# EAGLE board untitled (EAGLE 9.6.2)
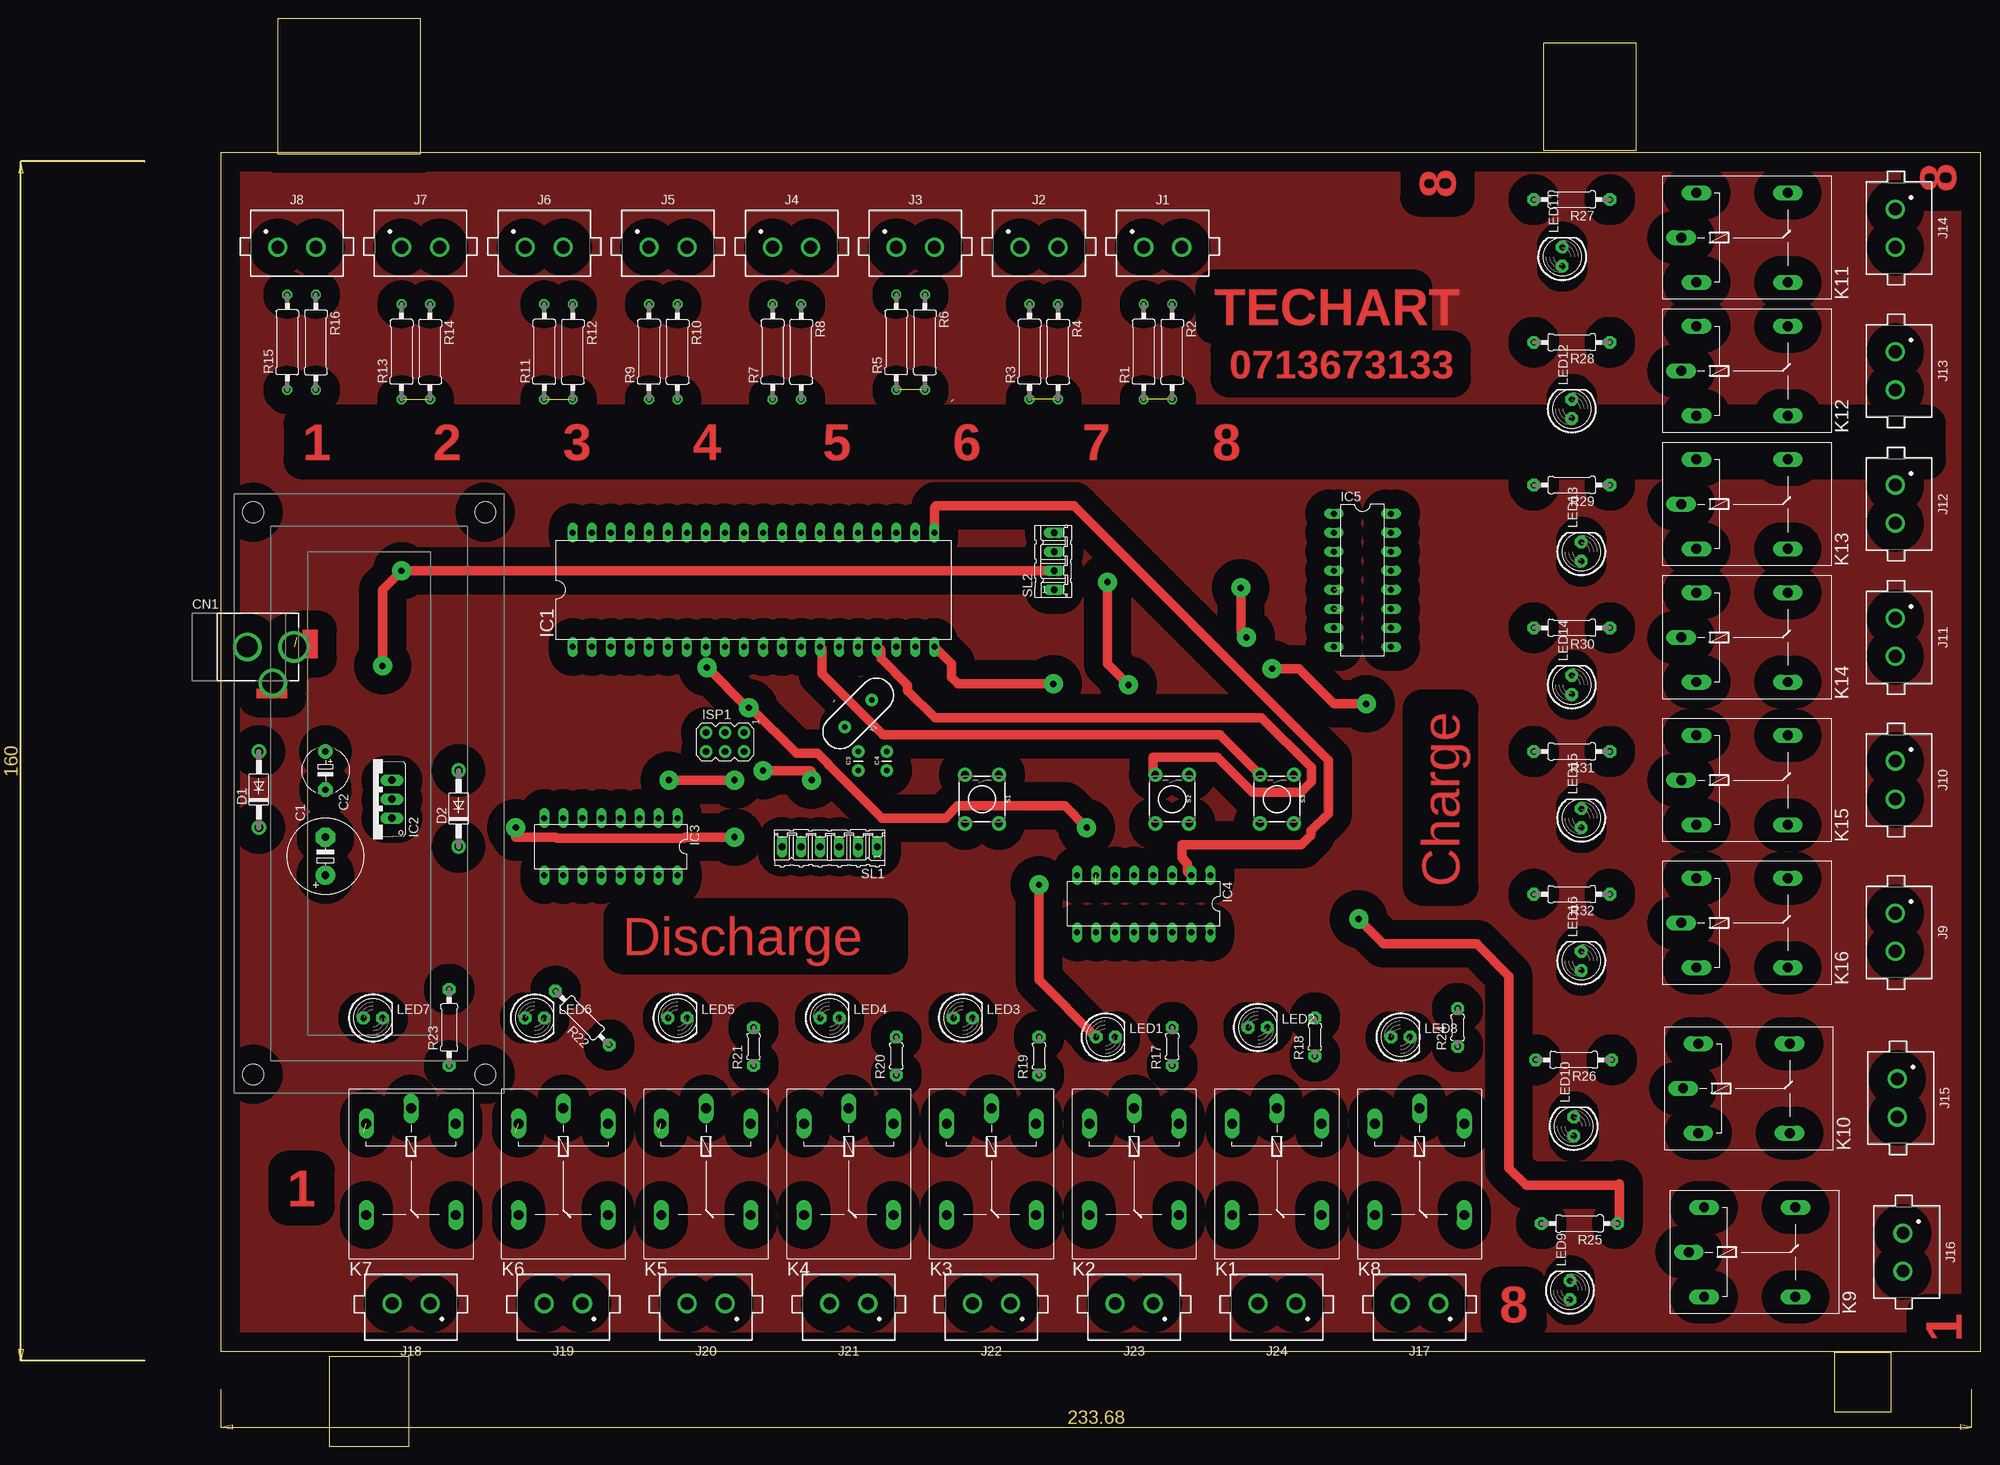
[diagram p0: board, top side]
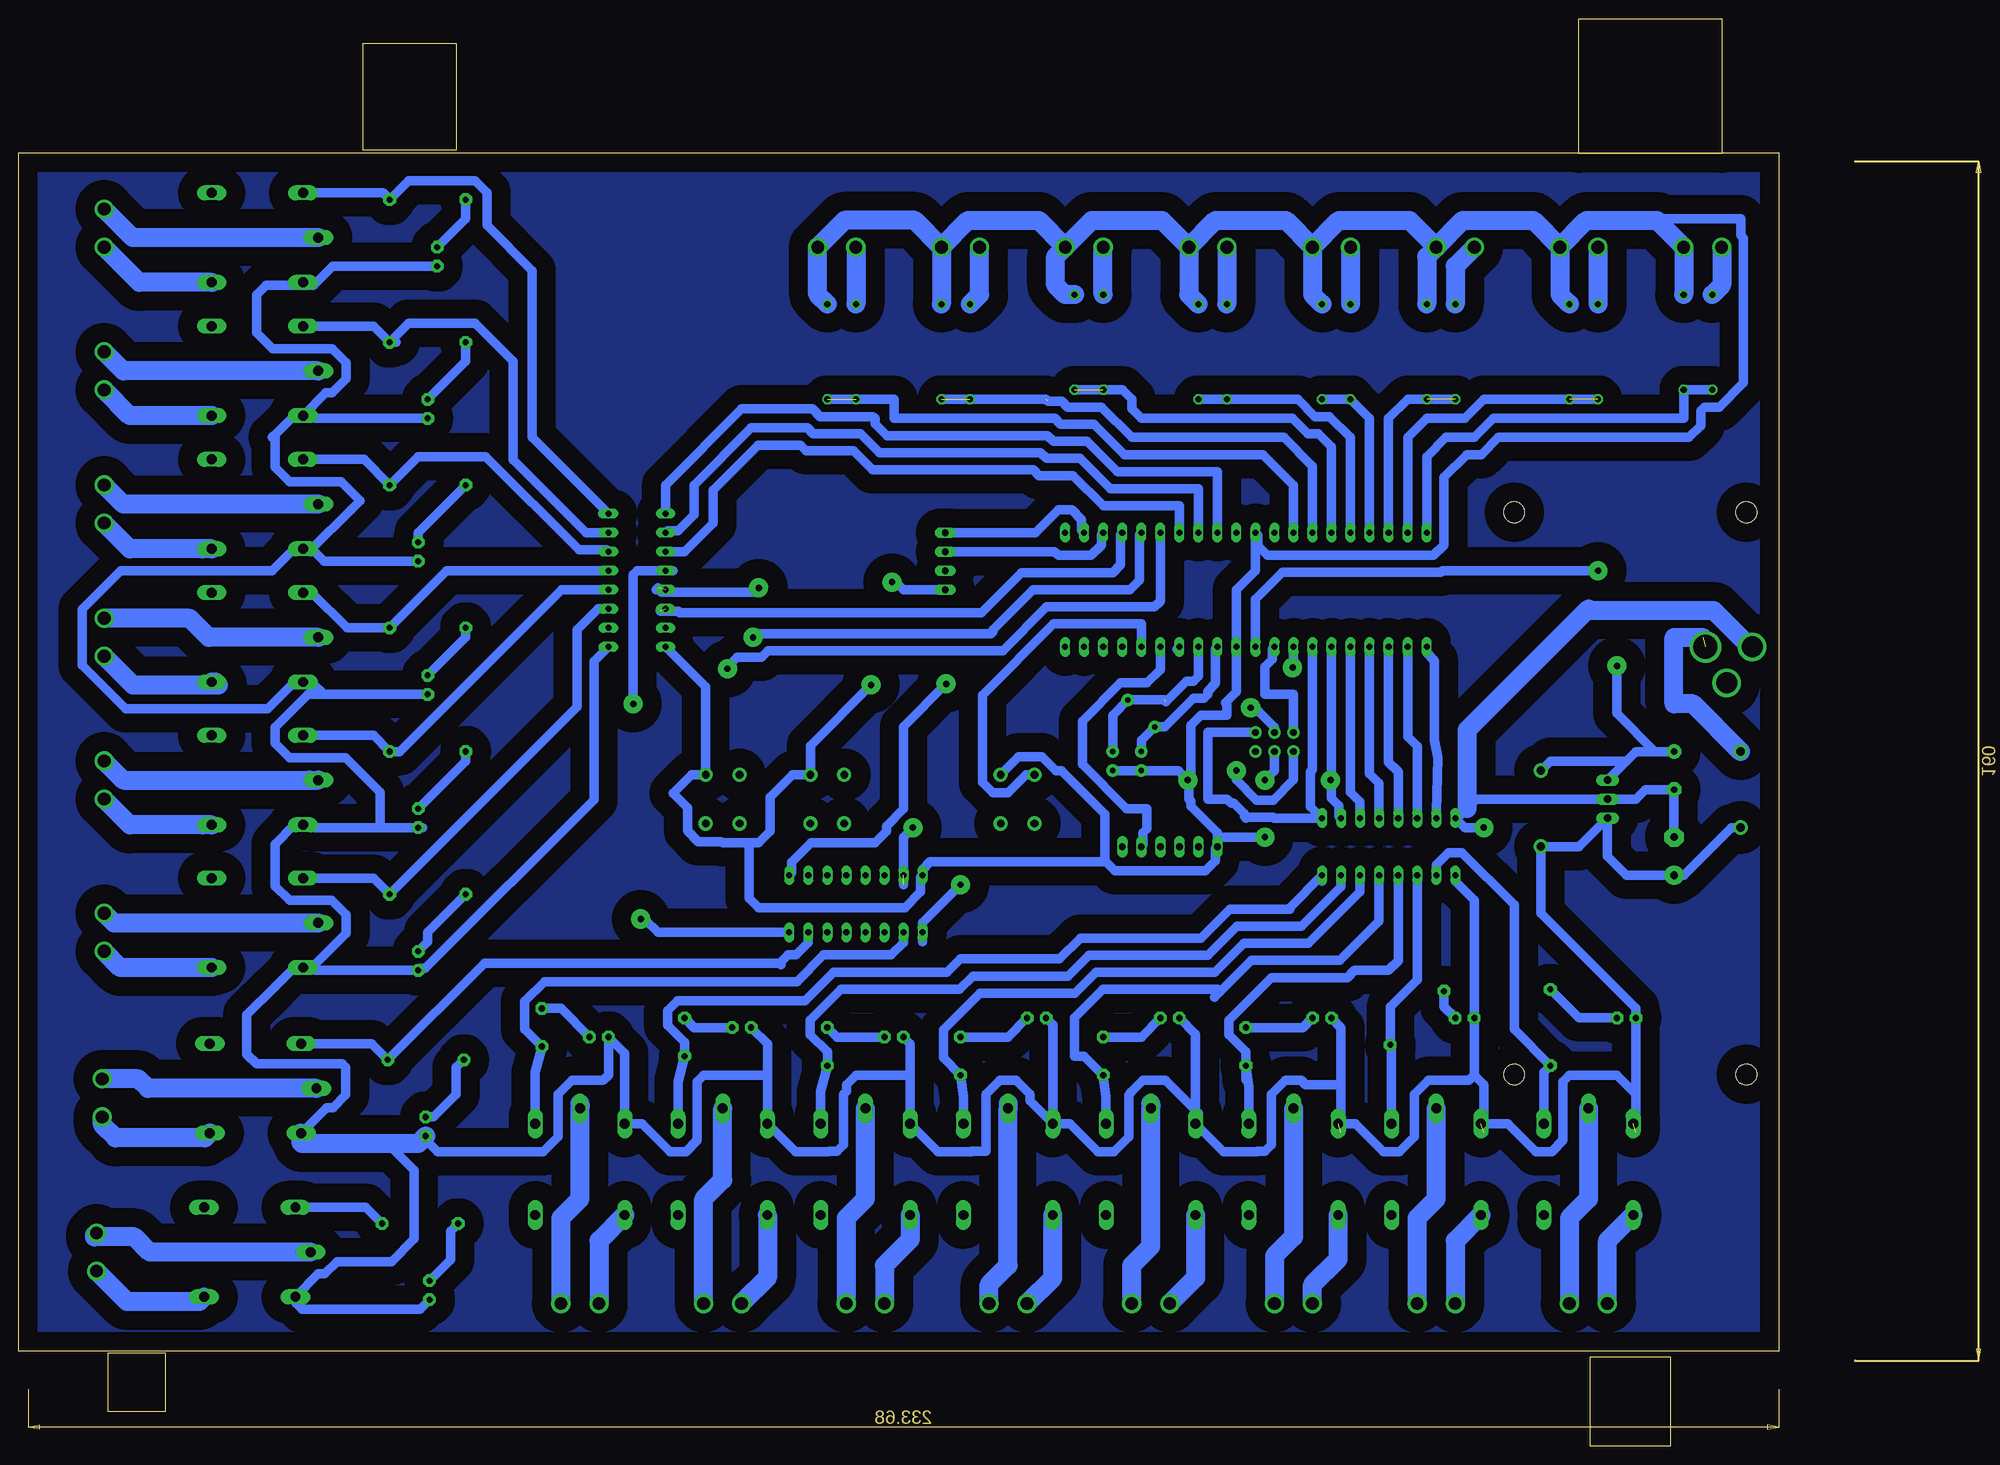
[diagram p1: board, bottom side, seen from below]

Size 234.93 x 190.5 mm. Coordinates in mm from the lower left corner, seen from the top.
Outline: 0,12.7 234.93,12.7 234.93,172.64 0,172.64 0,12.7
Copper layers (1*16): Top 0.035mm / dielectric 1.5mm / Bottom 0.035mm
Design rules "default *": minimum track width 50mil, minimum drill 0.35mm, track to track 40mil, track to pad 30mil, pad to pad 6mil, via to via 6mil, smd to smd 6mil, copper to edge 40mil, drill to drill 6mil, minimum pad ring 10mil, minimum via ring 8mil, stop-mask expansion 4mil, vias tented up to drill 0mil, thermal gap 10mil
Holes 2.8 mm at 4.31,49.62 35.31,49.62 4.31,124.62 35.31,124.62

## Footprints (pad centres in the part's own frame; a part is rotated, then mirrored left to right if it is on the bottom)
E5-10,5 = drill 1.016 pad 2.54: + -2.54,0 | drill 1.016 pad 2.54 octagon: - 2.54,0
E5-6 = drill 0.813 pad 1.905: + -2.54,0 | drill 0.813 pad 1.905 octagon: - 2.54,0
CAP-PTH-2.54 = drill 0.7 pad 1.651: 1 -1.27,0; 2 1.27,0
DCJACK_2MM_PTH = drill 2.8: GND 0,7.35; GNDBREAK 4.8,10.75 | drill 3.2: PWR 0,13.6
DO41-10 = drill 1.118 pad 1.93: A 5.08,0; C -5.08,0
DIL40 = drill 0.813 long: 1 -24.13,-7.62; 2 -21.59,-7.62; 3 -19.05,-7.62; 4 -16.51,-7.62; 5 -13.97,-7.62; 6 -11.43,-7.62; 7 -8.89,-7.62; 8 -6.35,-7.62; 9 -3.81,-7.62; 10 -1.27,-7.62; 11 1.27,-7.62; 12 3.81,-7.62; 13 6.35,-7.62; 14 8.89,-7.62; 15 11.43,-7.62; 16 13.97,-7.62; 17 16.51,-7.62; 18 19.05,-7.62; 19 21.59,-7.62; 20 24.13,-7.62; 21 24.13,7.62; 22 21.59,7.62; 23 19.05,7.62; 24 16.51,7.62; 25 13.97,7.62; 26 11.43,7.62; 27 8.89,7.62; 28 6.35,7.62; 29 3.81,7.62; 30 1.27,7.62; 31 -1.27,7.62; 32 -3.81,7.62; 33 -6.35,7.62; 34 -8.89,7.62; 35 -11.43,7.62; 36 -13.97,7.62; 37 -16.51,7.62; 38 -19.05,7.62; 39 -21.59,7.62; 40 -24.13,7.62
TO220V = drill 1.016 long: 1 -2.54,-2.54; 2 0,-2.54; 3 2.54,-2.54
DIL16 = drill 0.813 long: 1 -8.89,-3.81; 2 -6.35,-3.81; 3 -3.81,-3.81; 4 -1.27,-3.81; 5 1.27,-3.81; 6 3.81,-3.81; 7 6.35,-3.81; 8 8.89,-3.81; 9 8.89,3.81; 10 6.35,3.81; 11 3.81,3.81; 12 1.27,3.81; 13 -1.27,3.81; 14 -3.81,3.81; 15 -6.35,3.81; 16 -8.89,3.81
AVRISP = drill 0.9 pad 1.626: 1 -1.27,2.54; 2 1.27,2.54; 3 -1.27,0; 4 1.27,0; 5 -1.27,-2.54; 6 1.27,-2.54
691305530002 = drill 1.7: 1 -2.54,0; 2 2.54,0
G5LE = drill 1.321 long: 1 -7.493,-5.969; 2 -7.493,5.969; O 4.699,5.969; P -9.525,0; S 4.699,-5.969
LED5MM = drill 0.813 pad 1.676 octagon: A -1.27,0; K 1.27,0
0309/12 = drill 0.813 octagon: 1 -6.35,0; 2 6.35,0
0204/5 = drill 0.813 pad 1.676 octagon: 1 -2.54,0; 2 2.54,0
0207/10 = drill 0.813 pad 1.676 octagon: 1 -5.08,0; 2 5.08,0
TACTILE_SWITCH_PTH_6.0MM_KIT = drill 1.016 pad 1.88: 1 -3.251,2.261; 2 3.251,2.261; 3 -3.251,-2.261; 4 3.251,-2.261
06P = drill 0.914 long: 1 -6.35,0; 2 -3.81,0; 3 -1.27,0; 4 1.27,0; 5 3.81,0; 6 6.35,0
04P = drill 0.914 long: 1 -3.81,0; 2 -1.27,0; 3 1.27,0; 4 3.81,0
HC49US = drill 0.7 pad 1.651: 1 -2.54,0; 2 2.54,0

## Placement (x,y rotation side)
C1  [E5-10,5]  13.97,78.74 90 top
C2  [E5-6]  13.97,90.17 270 top
C3  22pF  [CAP-PTH-2.54]  85.09,91.44 90 top
C4  22pF  [CAP-PTH-2.54]  88.9,91.44 90 top
CN1  [DCJACK_2MM_PTH]  -3.81,106.68 270 top
D1  1N4004  [DO41-10]  5.08,87.63 90 top
D2  1N4004  [DO41-10]  31.75,85.09 90 top
IC1  MEGA16-P  [DIL40]  71.12,114.3 0 top
IC2  7805TV  [TO220V]  20.32,86.36 90 top
IC3  ULN2003AN  [DIL16]  52.07,80.01 180 top
IC4  ULN2003AN  [DIL16]  123.19,72.39 180 top
IC5  ULN2003AN  [DIL16]  152.4,115.57 270 top
ISP1  AVRISP-6  [AVRISP]  67.31,93.98 270 top
J1  [691305530002]  125.73,160.02 0 top
J2  [691305530002]  109.22,160.02 0 top
J3  [691305530002]  92.71,160.02 0 top
J4  [691305530002]  76.2,160.02 0 top
J5  [691305530002]  59.69,160.02 0 top
J6  [691305530002]  43.18,160.02 0 top
J7  [691305530002]  26.67,160.02 0 top
J8  [691305530002]  10.16,160.02 0 top
J9  [691305530002]  223.52,68.58 270 top
J10  [691305530002]  223.52,88.9 270 top
J11  [691305530002]  223.52,107.95 270 top
J12  [691305530002]  223.52,125.73 270 top
J13  [691305530002]  223.52,143.51 270 top
J14  [691305530002]  223.52,162.56 270 top
J15  [691305530002]  223.77,46.48 270 top
J16  [691305530002]  224.54,25.91 270 top
J17  [691305530002]  160.02,19.05 180 top
J18  [691305530002]  25.4,19.05 180 top
J19  [691305530002]  45.72,19.05 180 top
J20  [691305530002]  64.77,19.05 180 top
J21  [691305530002]  83.82,19.05 180 top
J22  [691305530002]  102.87,19.05 180 top
J23  [691305530002]  121.92,19.05 180 top
J24  [691305530002]  140.97,19.05 180 top
K1  G5L  [G5LE]  140.97,35.56 270 top
K2  G5L  [G5LE]  121.92,35.56 270 top
K3  G5L  [G5LE]  102.87,35.56 270 top
K4  G5L  [G5LE]  83.82,35.56 270 top
K5  G5L  [G5LE]  64.77,35.56 270 top
K6  G5L  [G5LE]  45.72,35.56 270 top
K7  G5L  [G5LE]  25.4,35.56 270 top
K8  G5L  [G5LE]  160.02,35.56 270 top
K9  G5L  [G5LE]  205.49,25.91 0 top
K10  G5L  [G5LE]  204.72,47.75 0 top
K11  G5L  [G5LE]  204.47,161.29 0 top
K12  G5L  [G5LE]  204.47,143.51 0 top
K13  G5L  [G5LE]  204.47,125.73 0 top
K14  G5L  [G5LE]  204.47,107.95 0 top
K15  G5L  [G5LE]  204.47,88.9 0 top
K16  G5L  [G5LE]  204.47,69.85 0 top
LED1  [LED5MM]  118.11,54.61 0 top
LED2  [LED5MM]  138.43,55.88 0 top
LED3  [LED5MM]  99.06,57.15 0 top
LED4  [LED5MM]  81.28,57.15 0 top
LED5  [LED5MM]  60.96,57.15 0 top
LED6  [LED5MM]  41.91,57.15 0 top
LED7  [LED5MM]  20.32,57.15 0 top
LED8  [LED5MM]  157.48,54.61 0 top
LED9  [LED5MM]  180.09,20.83 90 top
LED10  [LED5MM]  180.59,42.67 90 top
LED11  [LED5MM]  179.07,158.75 90 top
LED12  [LED5MM]  180.34,138.43 90 top
LED13  [LED5MM]  181.61,119.38 90 top
LED14  [LED5MM]  180.34,101.6 90 top
LED15  [LED5MM]  181.61,83.82 90 top
LED16  [LED5MM]  181.61,64.77 90 top
R1  [0309/12]  123.19,146.05 90 top
R2  [0309/12]  127,146.05 270 top
R3  [0309/12]  107.95,146.05 90 top
R4  [0309/12]  111.76,146.05 270 top
R5  [0309/12]  90.17,147.32 90 top
R6  [0309/12]  93.98,147.32 270 top
R7  [0309/12]  73.66,146.05 90 top
R8  [0309/12]  77.47,146.05 270 top
R9  [0309/12]  57.15,146.05 90 top
R10  [0309/12]  60.96,146.05 270 top
R11  [0309/12]  43.18,146.05 90 top
R12  [0309/12]  46.99,146.05 270 top
R13  [0309/12]  24.13,146.05 90 top
R14  [0309/12]  27.94,146.05 270 top
R15  [0309/12]  8.89,147.32 90 top
R16  [0309/12]  12.7,147.32 270 top
R17  [0204/5]  127,53.34 90 top
R18  [0204/5]  146.05,54.61 90 top
R19  [0204/5]  109.22,52.07 90 top
R20  [0204/5]  90.17,52.07 90 top
R21  [0204/5]  71.12,53.34 90 top
R22  [0207/10]  48.26,57.15 135 top
R23  [0207/10]  30.48,55.88 90 top
R24  [0204/5]  165.1,55.88 90 top
R25  [0207/10]  181.36,29.72 180 top
R26  [0207/10]  180.59,51.56 180 top
R27  [0207/10]  180.34,166.37 180 top
R28  [0207/10]  180.34,147.32 180 top
R29  [0207/10]  180.34,128.27 180 top
R30  [0207/10]  180.34,109.22 180 top
R31  [0207/10]  180.34,92.71 180 top
R32  [0207/10]  180.34,73.66 180 top
S1  MOMENTARY-SWITCH-SPST-PTH-6.0MM-KIT  [TACTILE_SWITCH_PTH_6.0MM_KIT]  101.6,86.36 270 top
S2  MOMENTARY-SWITCH-SPST-PTH-6.0MM-KIT  [TACTILE_SWITCH_PTH_6.0MM_KIT]  127,86.36 270 top
S3  MOMENTARY-SWITCH-SPST-PTH-6.0MM-KIT  [TACTILE_SWITCH_PTH_6.0MM_KIT]  140.97,86.36 270 top
SL1  [06P]  81.28,80.01 180 top
SL2  [04P]  111.25,118.11 90 top
Y1  16MHz  [HC49US]  85.09,97.79 225 top

## Library data of the parts
C1 C2 = BeagleBone_Blue_R3
C3 C4 = SparkFun-Capacitors; PROD_ID: CAP-09128
CN1 D1 D2 ISP1 LED1-LED16 R17-R32 = adafruit
IC1 = avr-7
IC2 = linear
IC3-IC5 = uln-udn
J1-J24 = Wurth_Connectors_WR-TBL Pluggable Connector; DATASHEET-URL: https://www.we-online.com/catalog/datasheet/691305530002.pdf; IR-UL: 16A; MOUNT: THT; PART-NUMBER: 691305530002; PINS: 2; PITCH: 5.08mm; TYPE: Vertical; WORKING-VOLTAGE-UL: 300V (AC)
K1-K16 = relay; OC_FARNELL: unknown; OC_NEWARK: unknown
R1-R16 = BeagleBone_Black_Wireless
S1-S3 = SparkFun-Switches; PROD_ID: SWCH-08441; SF_SKU: COM-00097
SL1 SL2 = con-amp-quick; OC_FARNELL: unknown; OC_NEWARK: unknown
Y1 = SparkFun-Clocks; PROD_ID: XTAL-08181; SF_ID: COM-00536

## Nets
AREF: IC1.32
AVCC: IC1.30
CH0: IC1.20 IC4.1
CH1: IC1.21 IC4.2
CH2: IC1.24 IC5.6
CH3: IC1.25 IC5.5
CH4: IC1.26 IC5.4
CH5: IC1.27 IC5.3
CH6: IC1.28 IC5.2
CH7: IC1.29 IC5.1
DS0: IC1.1 IC3.7
DS1: IC1.2 IC3.6
DS2: IC1.3 IC3.5
DS3: IC1.4 IC3.4
DS4: IC1.5 IC3.3
GND: C1.- C2.- C3.1 C4.1 CN1.GND IC1.11 IC1.31 IC2.2 IC3.8 IC4.8 IC5.8 ISP1.6 J1.2 J2.2 J3.2 J4.2 J5.2 J6.2 J7.2 J8.2 R2.1 R4.1 R6.1 R8.1 R10.1 R12.1 R14.1 R16.1 S1.1 S2.1 S3.1 SL1.6 SL2.1
GNDBREAK: CN1.GNDBREAK
MISO: IC1.7 IC3.1 ISP1.1
MOSI: IC1.6 IC3.2 ISP1.4
N$1: C2.+ D2.A IC1.10 IC2.3 SL2.2
N$2: C1.+ D1.C D2.C IC2.1 IC3.9 IC4.9 IC5.9 K1.1 K2.1 K3.1 K4.1 K5.1 K6.1 K7.1 K8.1 K9.1 K10.1 K11.1 K12.1 K13.1 K14.1 K15.1 K16.1 LED1.A LED2.A LED3.A LED4.A LED5.A LED6.A LED7.A LED8.A LED9.A LED10.A LED11.A LED12.A LED13.A LED14.A LED15.A LED16.A
N$3: IC1.16 S1.3
N$4: IC1.23 SL2.3
N$5: C3.2 IC1.12 Y1.2
N$6: C4.2 IC1.13 Y1.1
N$7: IC1.22 SL2.4
N$8: J1.1 R1.2
N$9: IC1.17 S2.3
N$10: IC4.10 K8.2 R24.1
N$11: IC1.33 R1.1 R2.2
N$12: J2.1 R3.2
N$13: IC1.34 R3.1 R4.2
N$14: J3.1 R5.2
N$15: IC1.35 R5.1 R6.2
N$16: J4.1 R7.2
N$17: IC1.36 R7.1 R8.2
N$18: J5.1 R9.2
N$19: J6.1 R11.2
N$20: IC1.38 R11.1 R12.2
N$21: J7.1 R13.2
N$22: IC1.39 R13.1 R14.2
N$23: J8.1 R15.2
N$24: IC1.40 R15.1 R16.2
N$25: IC1.37 R9.1 R10.2
N$26: IC1.14 S3.3
N$27: IC4.16 K9.2 R25.1
N$28: IC4.15 K10.2 R26.1
N$29: IC5.16 K11.2 R27.1
N$30: IC5.12 K15.2 R31.1
N$31: IC3.16 K1.2 R18.1
N$32: IC3.15 K2.2 R17.1
N$33: IC3.14 K3.2 R19.1
N$34: IC3.13 K4.2 R20.1
N$35: IC3.12 K5.2 R21.1
N$36: IC3.11 K6.2 R22.1
N$37: IC3.10 K7.2 R23.1
N$38: IC5.13 K14.2 R30.1
N$39: IC5.14 K13.2 R29.1
N$40: IC5.15 K12.2 R28.1
N$41: IC5.11 K16.2 R32.1
N$42: J9.2 K16.S
N$43: J9.1 K16.P
N$44: J10.1 K15.P
N$45: J10.2 K15.S
N$46: J11.1 K14.P
N$47: J11.2 K14.S
N$48: J12.1 K13.P
N$49: J12.2 K13.S
N$50: J13.1 K12.P
N$51: CN1.PWR D1.A
N$52: J13.2 K12.S
N$53: J14.1 K11.P
N$54: J14.2 K11.S
N$55: J15.1 K10.P
N$56: J15.2 K10.S
N$57: J16.1 K9.P
N$58: J16.2 K9.S
N$59: J17.1 K8.P
N$60: J17.2 K8.S
N$61: J18.1 K7.P
N$62: J18.2 K7.S
N$63: J19.1 K6.P
N$64: J19.2 K6.S
N$65: J20.1 K5.P
N$66: J20.2 K5.S
N$67: J21.1 K4.P
N$68: J21.2 K4.S
N$69: J22.1 K3.P
N$70: J22.2 K3.S
N$71: J23.1 K2.P
N$72: J23.2 K2.S
N$73: J24.1 K1.P
N$74: J24.2 K1.S
N$75: LED2.K R18.2
N$76: LED1.K R17.2
N$77: LED3.K R19.2
N$78: LED4.K R20.2
N$79: LED5.K R21.2
N$80: LED6.K R22.2
N$81: LED7.K R23.2
N$82: LED8.K R24.2
N$83: LED9.K R25.2
N$84: LED10.K R26.2
N$85: LED11.K R27.2
N$86: LED12.K R28.2
N$87: LED13.K R29.2
N$88: LED14.K R30.2
N$89: LED15.K R31.2
N$90: LED16.K R32.2
RST: IC1.9 ISP1.5
SCK: IC1.8 IC4.7 ISP1.3
TX: IC1.15 SL1.2
VCC: ISP1.2

## Tracks (layer width: path | path; a pad name or v marks a point on that pad's centre or on a via)
CH0  (via drill 0.85 pad 2.54)
  Top 1.27: IC1.20 97.54,104.39 97.54,102.62 98.42,101.73 v111.12,101.73
  Bottom 1.27: IC4.1 131.75,76.53 131.75,77.93 129.16,80.52 120.65,80.52 119.13,82.04 119.13,82.77 116.84,85.05 116.84,96.01 v111.12,101.73 110.74,102.11
CH1
  Top 1.27: IC1.21 95.25,125.22 95.5,125.48 113.9,125.48 147.85,91.53 147.85,84.43 145.54,82.11 145.54,81.53 144.27,80.26 128.27,80.26 128.27,78.5 129.06,77.71 129.06,76.68 IC4.2
CH2  (1 unrouted)
  Bottom 1.27: IC1.24 87.88,121.67 87.88,117.6 88.9,116.59 101.09,116.59 106.43,111.25 146.68,111.25 146.86,111.43 149.28,111.43 149.35,111.51
CH3  (via drill 0.85 pad 2.54)  (1 unrouted)
  Top 1.27: v136.91,107.95 136.14,108.71 v136.14,114.55
  Bottom 1.27: 149.61,114.55 149.86,114.3 | IC1.25 85.34,121.67 85.34,115.57 86.61,114.3 99.57,114.3 104.9,108.97 104.9,108.71 105.16,108.46 136.14,108.46 136.65,107.95 v136.91,107.95 | v136.14,114.55 136.73,113.97 149.1,113.97 148.77,114.3 IC5.5
CH4  (via drill 0.85 pad 2.54)
  Top 1.27: v140.33,103.76 143.89,103.76 148.59,99.06 v152.91,99.06
  Bottom 1.27: IC1.26 82.55,112.78 83.31,112.01 97.72,112.01 103.56,106.17 134.91,106.17 135.8,105.28 139.06,105.28 140.46,103.89 v140.33,103.76 | v152.91,99.06 152.91,116.33 152.4,116.84 IC5.4 147.57,116.84
CH5
  Bottom 1.27: IC1.27 80.01,125.48 90.15,125.48 94.21,129.54 98.71,129.54 99.48,130.3 120.95,130.3 123.49,132.84 129.84,132.84 130.6,133.6 136.21,133.6 142.24,127.58 142.24,123.19 146.05,119.38 IC5.3
CH6
  Bottom 1.27: IC5.2 148.34,122.17 146.94,122.17 144.78,124.33 144.78,128.27 137.16,135.89 129.66,135.89 128.89,135.13 122.54,135.13 120,132.59 98.53,132.59 97.77,131.83 93.27,131.83 89.2,127.76 77.47,127.76 IC1.28
CH7
  Bottom 1.27: IC5.1 148.59,128.27 138.43,138.43 128.96,138.43 127.95,137.41 120.9,137.41 120.65,137.16 120.65,136.47 119.06,134.87 97.79,134.87 97.58,134.87 96.82,134.11 92.32,134.11 88.25,130.05 74.93,130.05 IC1.29
DS0
  Bottom 1.27: IC1.1 46.99,105.87 45.95,104.83 45.95,94.24 45.49,91.87 45.72,84.63 IC3.7
DS1
  Bottom 1.27: IC1.2 49.53,105.87 49.53,94.69 48.26,93.42 48.26,84.63 IC3.6
DS2
  Bottom 1.27: IC1.3 52.07,105.87 52.07,91.25 50.8,89.98 50.8,84.63 IC3.5
DS3
  Bottom 1.27: IC1.4 54.61,105.87 54.61,89.71 53.34,88.44 53.34,84.63 IC3.4
DS4
  Bottom 1.27: IC1.5 57.15,105.87 57.15,87.28 55.88,86.01 55.88,84.63 IC3.3
GND  (via drill 0.85 pad 2.54)
  Top 1.27: v39.37,82.55 39.37,81.28 44.69,81.28 44.87,81.1 61.81,81.1 61.99,81.28 v68.58,81.28 | v72.39,90.17 78.74,90.17 78.87,90.04 v78.87,88.9 | v118.36,115.32 118.36,104.39 v121.16,101.6
  Bottom 1.27: C1.- C2.- 17.78,87.63 19.05,86.36 IC2.2 40.34,86.36 41.61,85.09 42.88,83.82 IC3.8 41.91,82.55 v39.37,82.55 | 16.26,163.58 16,163.83 5.08,163.83 5.08,161.61 4.7,161.23 4.7,141.93 7.94,138.68 9.91,138.68 10.41,138.18 10.41,136.21 12.01,134.62 37.41,134.62 39.69,132.33 41.66,132.33 44.7,129.29 44.7,120.27 46.08,118.9 68.23,118.9 69.52,120.19 69.52,121.59 IC1.31 69.85,116.84 72.39,114.3 IC1.11 72.39,100.67 73.88,99.19 73.66,98.97 73.66,97.54 77.15,97.54 78.49,96.2 78.49,89.28 v78.87,88.9 | SL1.6 74.93,81.28 v68.58,81.28 | ISP1.6 64.77,88.94 67.48,86.23 69.69,86.23 72.39,88.94 v72.39,90.17 | v78.87,88.9 78.74,89.03 78.74,86.36 78.49,86.11 78.49,85.41 74.93,81.86 SL1.6 | v78.87,88.9 80.14,90.17 C3.1 C4.1 | S1.1 101.45,92.02 98.34,92.02 96.49,90.17 95.76,90.17 89.94,84.35 89.94,78.14 | 89.94,78.14 88.59,76.78 76.51,76.78 75.16,78.14 75.16,79.78 SL1.6 | IC5.8 143.23,101.32 S3.1 145.08,89.61 147.57,87.12 145.64,85.19 145.64,82.11 144.23,80.7 141.15,80.7 140.97,80.52 137.16,80.52 | 137.16,80.52 136.14,80.52 134.62,82.04 134.62,86.61 131.62,89.61 S2.1 129.26,93.5 v121.16,101.6 | 137.16,80.52 137.41,80.26 137.41,73.15 136.14,71.88 116.66,71.88 114.55,73.98 114.55,75.95 IC4.8 114.3,76.96 113.28,77.98 90.1,77.98 89.94,78.14 | SL2.1 116.84,114.3 118.11,115.57 v118.36,115.32
  Bottom 2.54: CN1.GND 3.86,106.68 8.69,111.51 25.15,111.51 25.4,111.76 41.61,95.55 41.61,85.09 | J7.2 25.65,163.58 16.26,163.58 J8.2 R16.1 | J2.2 115.32,163.58 124.71,163.58 J1.2 128.27,153.67 R2.1 | J6.2 42.16,163.58 32.77,163.58 J7.2 | J2.2 108.2,163.58 98.81,163.58 J3.2 | J5.2 58.67,163.58 49.28,163.58 J6.2 | J3.2 91.69,163.58 82.3,163.58 J4.2 | J4.2 75.18,163.58 65.79,163.58 J5.2 | J2.2 R4.1 | J4.2 78.74,153.67 R8.1 | J5.2 62.23,153.67 R10.1 | J7.2 29.21,153.67 R14.1 | J6.2 46.99,158.75 R12.1 | R6.1 95.25,153.67 96.52,154.94 96.52,158.75 J3.2
MISO
  Bottom 1.27: ISP1.1 76.2,95.25 76.2,86.36 73.66,86.36 73.08,85.78 72.7,85.78 71.35,84.42 71.35,84.05 71.12,83.82 70.99,83.95 67.48,83.95 67.35,83.82 IC3.1 62.48,85.34 62.48,90 62.23,90.26 IC1.7
MOSI  (via drill 0.85 pad 2.54)
  Top 1.27: v59.82,88.9 v68.58,88.9
  Bottom 1.27: IC1.6 59.69,90.17 59.69,89.03 | 59.69,89.03 59.69,86.49 58.67,85.47 58.67,84.07 IC3.2 | 59.69,89.03 v59.82,88.9 | v68.58,88.9 67.31,90.17 ISP1.4
N$1  (via drill 0.85 pad 2.54)
  Top 1.27: v21.59,104.14 21.59,114.3 v24.13,116.84 SL2.2
  Bottom 1.27: 20.32,91.44 19.05,92.71 C2.+ 16.51,92.71 21.59,97.79 v21.59,104.14 | 20.32,91.44 IC2.3 | 20.32,91.44 30.48,91.44 D2.A | IC1.10 69.85,113.03 66.27,116.61 45.13,116.61 44.9,116.84 v24.13,116.84
N$2  (via drill 0.85 pad 2.54)  (3 unrouted)
  Top 1.27: LED1.A 109.22,62.23 v109.22,74.93
  Bottom 1.27: 186.69,82.55 LED15.A 180.99,82.55 | 186.69,82.55 195.43,82.55 195.81,82.93 K15.1 198.14,82.93 200.71,80.37 200.71,74.76 198.79,72.83 193.13,72.83 191.21,70.91 191.21,68.48 195.81,63.88 | LED12.A 195.43,137.16 195.81,137.54 K12.1 | 200.71,134.98 198.14,137.54 K12.1 | 200.71,134.98 200.71,130.64 198.79,128.71 191.91,128.71 189.38,126.19 190.65,124.92 195.81,119.76 | 200.71,134.98 201.07,134.62 | K12.1 193.93,140.59 193.07,140.59 191.21,142.45 191.21,144.57 193.07,146.43 201.04,146.43 203.2,148.59 203.2,153.67 201.93,154.94 195.58,154.94 | K11.1 195.58,154.94 | 195.58,154.94 193.04,157.48 LED11.A | LED13.A 194.16,118.11 195.81,119.76 | 195.81,119.76 K13.1 198.14,119.76 201.07,116.84 221.3,116.84 226.44,111.7 226.44,104.2 220.67,98.42 201.7,98.42 198.14,101.98 K14.1 195.81,101.98 194.16,100.33 LED14.A 196.31,100.33 200.71,95.93 200.71,93.81 198.79,91.88 191.27,91.88 186.69,87.3 186.69,82.55 | 195.81,63.88 K16.1 198.14,63.88 199.72,62.31 200.71,61.32 204.47,57.56 204.47,52.32 203.2,51.05 191.77,51.05 191.26,50.55 191.26,46.89 192.97,45.19 193.83,45.19 K10.1 | 195.81,63.88 195.43,63.5 LED16.A 181.36,63.75 180.66,63.75 158.11,86.3 158.11,104.78 IC5.9 | IC3.9 43.18,75.39 40.64,72.85 LED6.A 40.64,49.53 | 135,49.53 K1.1 131.27,39.32 126.83,39.32 126.78,39.37 125.73,39.37 124.84,40.26 124.84,46.96 124.46,47.34 124.46,48.26 123.19,49.53 115.95,49.53 | 135,49.53 135,53.72 LED2.A | 115.95,49.53 K2.1 112.22,39.32 107.78,39.32 107.73,39.37 105.79,39.37 105.79,46.96 103.93,48.82 101.81,48.82 99.95,46.96 99.95,46.1 K3.1 | 115.95,49.53 115.95,53.72 LED1.A
  Bottom 1.27: 135,49.53 143.51,49.53 144.37,48.67 144.37,40.82 145.88,39.32 148,39.32 151.73,43.05 K8.1 154.05,52.45 LED8.A 156.21,49.53 156.92,48.82 161.08,48.82 162.94,46.96 162.94,41.3 164.93,39.32 179.02,39.32 180.59,40.89 LED10.A | K3.1 96.9,56.26 LED3.A | K3.1 94.59,43.05 90.85,39.32 88.73,39.32 86.74,41.3 86.74,46.93 86.39,47.29 86.39,47.32 84.88,48.82 81.84,48.82 77.47,44.45 77.47,41.91 77.85,42.29 K4.1 | K4.1 77.85,54.99 LED4.A | K4.1 74.12,39.32 69.68,39.32 69.63,39.37 68.58,39.37 67.69,40.26 67.69,46.96 65.83,48.82 63.71,48.82 63.15,48.26 58.42,48.26 | 58.42,48.26 58.42,41.91 | 58.42,48.26 58.42,55.88 LED5.A | K5.1 56.48,43.05 52.75,39.32 50.63,39.32 48.64,41.3 48.64,46.96 46.78,48.82 41.35,48.82 40.64,49.53 | 39.37,41.91 39.37,48.26 40.64,49.53 | K6.1 36.16,43.05 32.43,39.32 30.31,39.32 28.8,40.82 28.8,48.67 27.94,49.53 21.59,49.53 19.05,46.99 | 19.05,41.91 19.05,46.99 | 19.05,46.99 LED7.A 19.05,58.42 31.75,71.12 D2.C 26.67,80.01 IC2.1 22.86,78.74 20.32,76.2 C1.+ 12.7,76.2 6.35,82.55 D1.C | v109.22,74.93 114.3,69.85 IC4.9 114.3,67.31 | LED9.A 181.36,18.29 197.1,18.29 197.99,19.18 K9.1 194.94,22.99 194.09,22.99 192.43,24.64 185.17,24.64 182.12,27.69 182.12,36.83 185.67,40.39
  Bottom 2.54: LED10.A 181.61,40.39 185.67,40.39 197.1,40.39 197.23,40.51 K10.1
N$3
  Bottom 1.27: S1.3 100.45,89.61 102.86,87.2 104.86,87.2 106.27,88.61 106.27,100.23 96.77,109.73 85.09,109.73 IC1.16
N$4
  Bottom 1.27: IC1.23 90.42,121.67 90.42,120.27 91.8,118.9 96.17,118.9 96.65,119.38 SL2.3 112.01,119.38
N$5
  Bottom 1.27: 75.01,106.6 IC1.12 75.18,106.43 75.18,101.8 76.2,100.78 76.2,100.33 76.71,99.82 78.09,99.82 81.92,95.99 Y1.2 85.09,94.2 C3.2
N$6  (1 unrouted)
  Bottom 1.27: C4.2 88.9,97.57 Y1.1 82.02,99.59 | IC1.13 77.47,102.74 78.11,102.11 79.04,102.11 81.81,99.34
N$7
  Bottom 1.27: IC1.22 93.04,122.25 93.04,123.65 94.34,124.94 96.17,124.94 99.19,121.92 SL2.4
N$8
  Bottom 2.54: J1.1 R1.2
N$9
  Top 1.27: IC1.17 88.11,106.2 88.11,105.17 91.69,101.59 91.69,100.84 95.31,97.22 138.93,97.22 145.57,90.58 145.57,88.64 144.2,87.27 137.74,87.27 133.07,91.95 124.46,91.95 124.46,89.89 S2.3
N$10
  Bottom 1.27: K8.2 165.99,49.91 R24.1 167.39,55.63 167.39,59.37 164.75,62 131.04,62 127.48,65.56 118.47,65.56 116.84,67.18 IC4.10
N$11  (1 unrouted)
  Bottom 1.27: IC1.33 64.77,128.27 68.83,132.33 87.31,132.33 91.37,136.4 95.87,136.4 96.64,137.16 118.11,137.16 118.11,139.7 R2.2
N$12
  Bottom 2.54: R3.2 106.68,153.67 J2.1
N$13  (2 unrouted)
  Bottom 1.27: R4.2 97.79,139.7 | IC1.34 62.23,130.81 66.04,134.62 86.36,134.62 90.42,138.68 94.93,138.68 95.69,139.45 97.54,139.45
N$14
  Bottom 2.54: R5.2 J3.1
N$15  (1 unrouted)
  Bottom 1.27: IC1.35 59.69,133.35 61.47,135.13 62.85,135.13 64.89,137.16 85.09,137.16 86.36,138.43 86.36,139.7 87.63,140.97 R6.2
N$16
  Bottom 2.54: J4.1 R7.2
N$17
  Bottom 1.27: IC1.36 57.15,134.62 59.94,137.41 61.91,137.41 64.19,139.7 R7.1 R8.2
N$18
  Bottom 2.54: J5.1 R9.2
N$19
  Bottom 2.54: J6.1 43.18,157.48 R11.2
N$20  (1 unrouted)
  Bottom 1.27: IC1.38 52.07,137.16 49.53,139.7 R11.1
N$21
  Bottom 2.54: J7.1 R13.2
N$22  (1 unrouted)
  Bottom 1.27: IC1.39 49.53,134.62 46.99,137.16 41.91,137.16 39.37,139.7 R13.1
N$23
  Bottom 2.54: J8.1 7.62,154.94 R15.2
N$24
  Bottom 1.27: IC1.40 46.99,132.08 44.45,134.62 40.64,134.62 38.1,137.16 12.7,137.16 R16.2 R15.1
N$25
  Bottom 1.27: IC1.37 54.61,137.16 R9.1 R10.2
N$26
  Top 1.27: IC1.14 80.26,106.43 80.26,103.06 88.4,94.93 133.39,94.93 S3.3
  Bottom 1.27: 80.34,106.35 IC1.14
N$27  (via drill 0.85 pad 2.54)
  Top 1.27: v151.89,70.36 155.19,67.06 167.64,67.06 171.96,62.74 171.96,37.08 174.24,34.8 186.44,34.8 186.69,35.05 186.69,29.97 R25.1
  Bottom 1.27: 132.08,68.12 IC4.16 149.61,68.58 151.38,70.36 v151.89,70.36 | R25.1 188.59,31.88 K9.2
N$28
  Bottom 1.27: 133.35,64.46 133.17,64.29 | 133.35,64.46 132.26,65.56 131.16,65.56 129.54,67.18 IC4.15 | 133.35,64.46 172.77,64.46 R26.1 187.83,53.72 K10.2
N$29
  Bottom 1.27: 157.02,124.46 IC5.16 166.37,134.62 166.37,156.89 172.39,162.91 172.39,167.31 173.99,168.91 182.88,168.91 R27.1 186.31,167.26 K11.2
N$30
  Bottom 1.27: K15.2 195.81,94.87 187.58,94.87 R31.1 184.05,92.71 162.46,114.3 157.02,114.3 IC5.12
N$31
  Bottom 1.27: K1.2 146.94,48.64 R18.1 146.05,53.92 148.34,56.2 148.34,58.1 147,59.44 129.98,59.44 126.15,63.27 114.53,63.27 | 60.96,75.39 IC3.16 65.28,71.88 65.28,71.68 73.25,71.68 77.12,67.82 93.22,67.82 96.01,65.02 109.22,65.02 111,63.25 114.55,63.25 114.53,63.27 | 114.53,63.27 114.41,63.27
N$32
  Bottom 1.27: K2.2 127.89,47.37 R17.1 127,52.65 129.29,54.93 129.29,56.83 125.15,60.96 109.34,60.96 107.56,62.74 94.86,62.74 92.06,65.53 76.17,65.53 72.31,69.4 63.72,69.4 58.42,74.69 IC3.15
N$33
  Bottom 1.27: K3.2 108.84,46.61 R19.1 111.51,51.82 111.51,55.56 106.61,60.45 93.91,60.45 91.12,63.25 75.23,63.25 71.36,67.11 62.77,67.11 55.88,74 IC3.14
N$34
  Bottom 1.27: K4.2 89.79,46.61 R20.1 92.71,52.07 93.98,52.07 93.98,57.15 90.17,60.96 74.93,60.96 74.61,60.64 | 75.32,59.92 74.61,60.64 | 74.61,60.64 70.41,64.83 58.55,64.83 53.34,70.04 IC3.13
N$35
  Bottom 1.27: R21.1 70.74,47.88 K5.2 | 71.12,48.88 R21.1 | R21.1 71.12,52.65 73.41,54.93 73.41,56.83 67.69,62.54 57.6,62.54 56.64,63.5 52.07,63.5 50.8,64.77 50.8,69.85 IC3.12
N$36
  Bottom 1.27: K6.2 51.69,53.41 R22.1 51.85,58.64 48.26,62.23 IC3.11
N$37
  Bottom 1.27: K7.2 31.37,44.22 31.37,49.91 R23.1 35.31,55.63 35.31,72.27 42.27,79.22 44.09,79.22 45.72,77.6 45.72,77.01 IC3.10
N$38
  Bottom 1.27: K14.2 195.81,113.92 191.11,109.22 R30.1 177.8,116.84 157.02,116.84 IC5.13
N$39
  Bottom 1.27: K13.2 188.85,131.7 R29.1 181.61,132.08 172.57,132.08 160.13,119.63 156.46,119.63 IC5.14
N$40
  Bottom 1.27: IC5.15 159.18,121.92 168.91,131.65 168.91,144.78 173.99,149.86 182.88,149.86 R28.1 | 184.58,147.32 R28.1 | 195.81,149.48 K12.2 187.58,149.48 R28.1
N$41
  Bottom 1.27: K16.2 195.81,75.82 187.58,75.82 R32.1 160.4,98.68 160.4,108.97 157.61,111.76 157.02,111.76 IC5.11
N$42
  Bottom 2.54: K16.S 221.36,63.88 J9.2
N$43
  Bottom 2.54: J9.1 222.25,69.85 196.11,69.85 K16.P
N$44
  Bottom 2.54: J10.1 220.98,88.9 196.11,88.9 K15.P
N$45
  Bottom 2.54: K15.S 210.34,82.93 220.09,82.93 J10.2
N$46
  Bottom 2.54: K14.P 209.55,107.95 212.09,110.49 J11.1
N$47
  Bottom 2.54: J11.2 219.71,101.6 208.28,101.6 208.66,101.98 K14.S
N$48
  Bottom 2.54: K13.P 196.11,125.73 220.98,125.73 J12.1
N$49
  Bottom 2.54: K13.S 210.34,119.76 220.09,119.76 J12.2
N$50
  Bottom 2.54: K12.P 220.98,143.51 J13.1
N$51  (1 unrouted)
  Bottom 2.54: D1.A 11.43,99.06 13.97,99.06 13.97,107.95 10.16,107.95
N$52
  Bottom 2.54: K12.S 220.09,137.54 J13.2
N$53
  Bottom 2.54: K11.P 196.11,161.29 219.71,161.29 J14.1
N$54
  Bottom 2.54: K11.S 218.82,155.32 J14.2
N$55
  Bottom 2.54: K10.P 217.68,47.75 218.95,49.02 J15.1
N$56
  Bottom 2.54: K10.S 210.06,41.15 222,41.15 223.77,42.93 J15.2
N$57
  Bottom 2.54: K9.P 217.42,25.91 219.46,27.94 224.79,27.94 224.79,28.19 J16.1
N$58
  Bottom 2.54: K9.S 210.82,19.3 220.47,19.3 J16.2
N$59
  Bottom 2.54: 160.02,45.72 K8.P 160.02,33.02 162.56,30.48 J17.1
N$60
  Bottom 2.54: K8.S 157.48,27.43 J17.2
N$61
  Bottom 2.54: K7.P 25.4,33.02 27.94,30.48 J18.1
N$62
  Bottom 2.54: J18.2 22.86,27.43 K7.S
N$63
  Bottom 2.54: J19.1 48.26,30.48 45.72,33.02 K6.P
N$64
  Bottom 2.54: K6.S 43.18,27.43 J19.2
N$65
  Bottom 2.54: K5.P 64.77,27.94 67.31,25.4 J20.1
N$66
  Bottom 2.54: J20.2 62.23,21.59 58.8,25.02 K5.S
N$67
  Bottom 2.54: J21.1 86.36,24.13 83.82,26.67 K4.P 83.82,45.72
N$68
  Bottom 2.54: K4.S 77.85,22.48 J21.2
N$69
  Bottom 2.54: J22.1 105.41,21.59 102.87,24.13 K3.P 102.87,45.72
N$70
  Bottom 2.54: J22.2 96.9,22.48 K3.S
N$71
  Bottom 2.54: J23.1 124.46,30.48 121.92,33.02 K2.P
N$72
  Bottom 2.54: K2.S 115.95,27.56 119.38,24.13 J23.2
N$73
  Bottom 2.54: J24.1 143.51,33.02 140.97,35.56 K1.P
N$74
  Bottom 2.54: K1.S 135,22.48 J24.2
N$75
  Bottom 1.27: R18.2 144.78,55.88 LED2.K
N$76
  Bottom 1.27: R17.2 125.73,54.61 LED1.K
N$77
  Bottom 1.27: R19.2 102.87,54.61 LED3.K
N$78
  Bottom 1.27: R20.2 85.09,54.61 LED4.K
N$79
  Bottom 1.27: R21.2 63.5,55.88 LED5.K
N$80
  Bottom 1.27: R22.2 44.67,58.64 LED6.K
N$81
  Bottom 1.27: R23.2 26.67,57.15 LED7.K
N$82
  Bottom 1.27: R24.2 162.56,58.42 LED8.K
N$83
  Bottom 1.27: R25.2 177.29,28.7 177.29,24.89 LED9.K
N$84
  Bottom 1.27: R26.2 176.53,50.55 176.53,46.99 179.58,43.94 LED10.K
N$85
  Bottom 1.27: LED11.K 175.26,163.83 R27.2
N$86
  Bottom 1.27: LED12.K 175.26,144.78 R28.2
N$87
  Bottom 1.27: R29.2 181.61,121.92 LED13.K
N$88
  Bottom 1.27: R30.2 175.26,107.95 LED14.K
N$89
  Bottom 1.27: LED15.K 175.26,91.44 R31.2
N$90
  Bottom 1.27: LED16.K 180.34,67.31 180.34,68.58 R32.2
N$91
  pour Top (isolate 2.54): 0,172.47 234.95,172.47 234.95,12.45 -0.25,12.45 -0.25,172.47
N$92
  pour Bottom (isolate 2.54): 0,172.72 234.7,172.72 234.95,172.47 234.95,12.7 234.44,12.19 0,12.19 -0.25,12.45 -0.25,172.72
RST
  Bottom 1.27: ISP1.5 64.77,100.33 68.58,100.33 68.58,104.01 67.56,105.03 67.56,106.43 IC1.9
SCK  (via drill 0.85 pad 2.54)  (1 unrouted)
  Top 1.27: v64.9,103.92 70.27,98.55 v70.48,98.55 70.74,98.55 76.84,92.46 79.69,92.46 81.15,90.99 81.15,90.96 88.3,83.82 96.75,83.82 98.37,85.45 112.67,85.45 v115.57,82.55
  Bottom 1.27: v64.9,103.92 64.77,104.05 IC1.8 | v70.48,98.55 70.26,98.78 69.53,98.04 69.4,98.04 67.31,95.96 ISP1.3 | v115.57,82.55 116.84,81.28 116.84,74.93
TX
  Bottom 1.27: IC1.15 82.55,103.63 84.31,101.87 87.87,101.87 92.96,96.77 92.96,91 87.05,85.09 84.33,85.09 84.33,82.41 84.86,81.88 84.86,80.24 SL1.2
(copper drawn outside any net)
  shapes: Top area x2

## Text on the board
Top: 8 | 8 | TECHART | 0713673133 | 1 2 3 4 5 6 7 8 | Charge | Discharge | 1 | 8 | 1
tDocu: 1